# EAGLE board proiect1 (EAGLE 9.7.0)
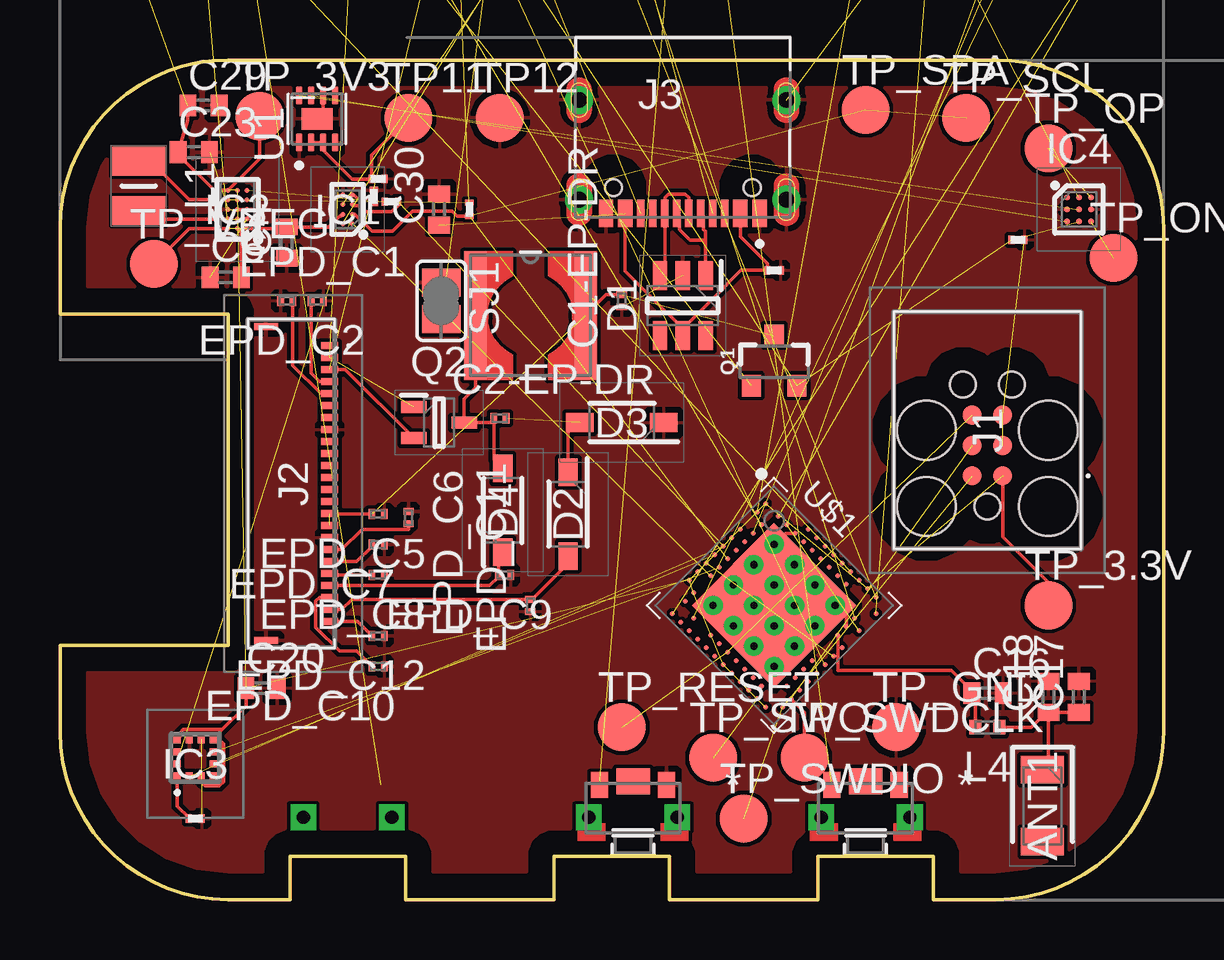
[diagram p0: board, top side]
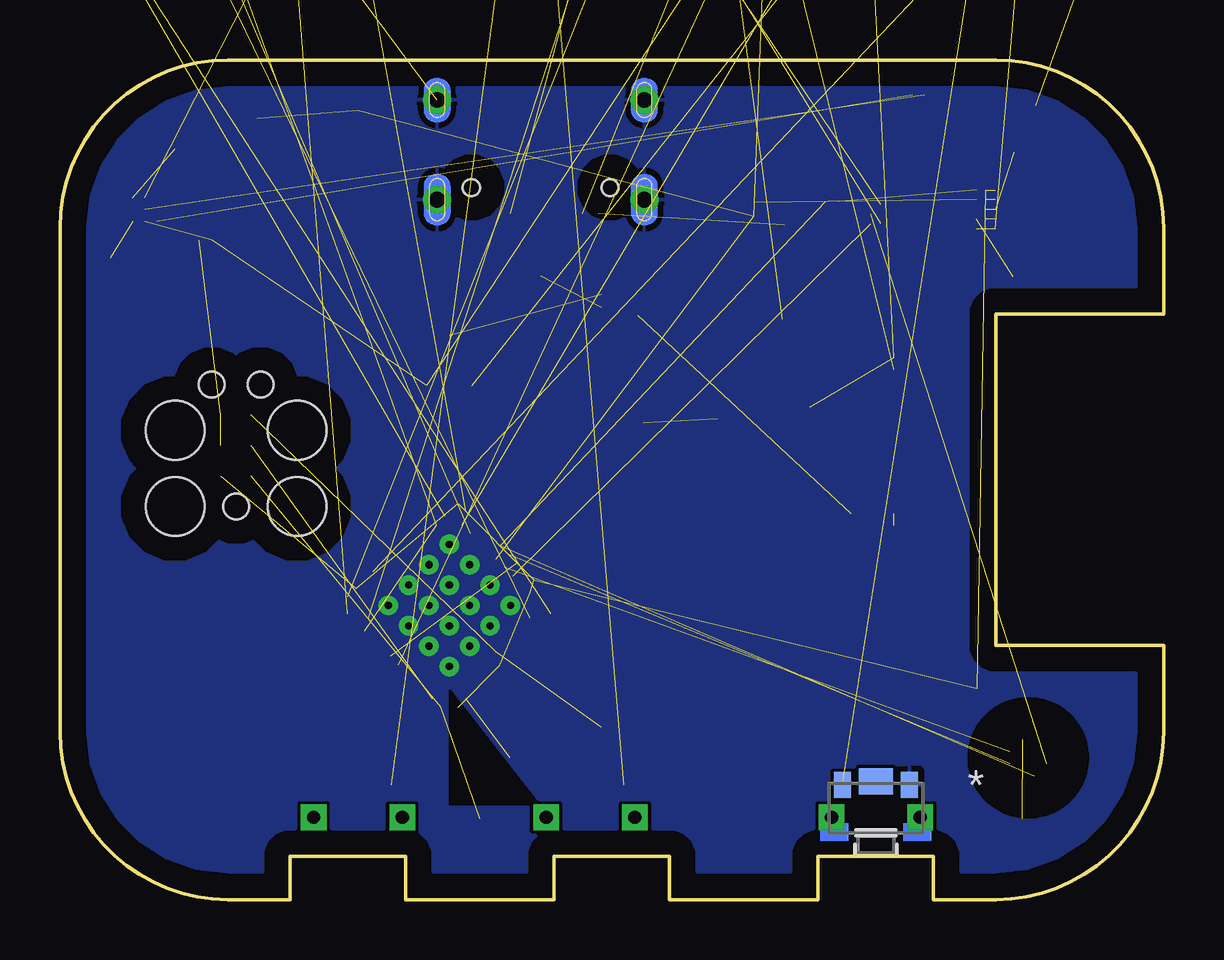
[diagram p1: board, bottom side, seen from below]

Size 46 x 35 mm. Coordinates in mm from the lower left corner, seen from the top.
Outline: 39,0 36.4,0 36.4,1.8 31.6,1.8 31.6,0 25.4,0 25.4,1.8 20.6,1.8 20.6,0 14.4,0 14.4,1.8 9.6,1.8 9.6,0 7,0 arc-90 0,7 0,10.6 7,10.6 7,24.4 0,24.4 0,28 arc-90 7,35 39,35 arc-90 46,28 46,7 arc-90 39,0
Copper layers (1*16): Top / Bottom
Stack-up Default Layer Stack: Top SilkScreen Epoxy Ink / Top SolderMask SR:Green 0.0254mm Dk 4.3 / Top Surface Finish Lead-Free 0.02mm / Top CuFoil:007 0.035mm / Dielectric-1 User Defined 1.5mm / Bottom CuFoil:007 0.035mm / Bottom Surface Finish Lead-Free 0.02mm / Bottom SolderMask SR:Green 0.0254mm Dk 4.3 / Bottom SilkScreen Epoxy Ink
Design rules: minimum copper width 6mil, minimum drill size 0.35mm, copper clearance wire_polygon to wire_polygon 6mil, copper clearance wire_polygon to pad_smd 6mil, copper clearance wire_polygon to via 6mil, copper clearance pad_smd to pad_smd 6mil, copper clearance pad_smd to via 6mil, copper clearance via to via 6mil, copper clearance smd to pad (same net) 6mil, copper clearance smd to via (same net) 6mil, copper clearance smd to smd (same net) 6mil, dimension clearance 40mil, via restrict clearance 0mil, restrict clearance 0mil, drill distance 6mil, keepout clearance 0mil

## Footprints (pad centres in the part's own frame; a part is rotated, then mirrored left to right if it is on the bottom)
2450AT18B100E_ANTC3216X140N = smd 1.15 x 1.8: 1 -1.5,0; 2 1.5,0
ESP32_C6_LIBRARY_1_ESP32_WROVER_EAGLE-LTSPICE_C0402 = smd 0.7 x 0.9: 1 -0.65,0; 2 0.65,0
NORDIC_NRF_3_RESC0201_L = smd 0.28 x 0.43: 1 -0.255,0; 2 0.255,0
GRM011R60J152KE01L_1_0201 = smd 0.35 x 0.25: 1 0,0.275; 2 0,-0.275
ESP32_C6_LIBRARY_3_SOT95P280X145-6N = smd 1.2 x 0.6: 1 -1.25,0.95; 2 -1.25,0; 3 -1.25,-0.95; 4 1.25,-0.95; 5 1.25,0; 6 1.25,0.95
ESP32_C6_LIBRARY_5_SOD3716X135N = smd 1.15 x 0.8: 1 -1.75,0; 2 1.75,0
BQ25180YBGR_BGA8C40P2X4_100X155X50 = smd 0.2 x 0.2: A1 -0.2,0.6; A2 0.2,0.6; B1 -0.2,0.2; B2 0.2,0.2; C1 -0.2,-0.2; C2 0.2,-0.2; D1 -0.2,-0.6; D2 0.2,-0.6
RT6160AWSC_BGA15C40P3X5_140X230X60 = smd 0.216 x 0.216: A1 -0.4,0.8; A2 0,0.8; A3 0.4,0.8; B1 -0.4,0.4; B2 0,0.4; B3 0.4,0.4; C1 -0.4,0; C2 0,0; C3 0.4,0; D1 -0.4,-0.4; D2 0,-0.4; D3 0.4,-0.4; E1 -0.4,-0.8; E2 0,-0.8; E3 0.4,-0.8
BMA423_BMA423 = smd 0.3 x 0.35: 1 -0.75,-0.775; 2 -0.25,-0.775; 3 0.25,-0.775; 4 0.75,-0.775; 7 0.75,0.775; 8 0.25,0.775; 9 -0.25,0.775; 10 -0.75,0.775 | smd 0.35 x 0.3: 5 0.775,-0.25; 6 0.775,0.25; 11 -0.775,0.25; 12 -0.775,-0.25
DRV2605YZFR_BGA9C50P3X3_144X144X62 = smd 0.25 x 0.25: A1 -0.5,0.5; A2 0,0.5; A3 0.5,0.5; B1 -0.5,0; B2 0,0; B3 0.5,0; C1 -0.5,-0.5; C2 0,-0.5; C3 0.5,-0.5
TC2030-IDC_TC2030IDC = smd 0.783 x 0.783: 1 -0.953,-0.635; 2 -0.953,0.635; 3 0.317,-0.635; 4 0.317,0.635; 5 1.588,-0.635; 6 1.588,0.635 | hole 2.451: -2.223,-2.54; -2.223,2.54; 0.952,-2.54; 0.952,2.54 | hole 1.067: -2.223,0; 2.857,-1.016; 2.857,1.016
503480-2400_5034802400 = smd 0.3 x 0.7: 1 -5.75,1.525; 2 -5.25,1.525; 3 -4.75,1.525; 4 -4.25,1.525; 5 -3.75,1.525; 6 -3.25,1.525; 7 -2.75,1.525; 8 -2.25,1.525; 9 -1.75,1.525; 10 -1.25,1.525; 11 -0.75,1.525; 12 -0.25,1.525; 13 0.25,1.525; 14 0.75,1.525; 15 1.25,1.525; 16 1.75,1.525; 17 2.25,1.525; 18 2.75,1.525; 19 3.25,1.525; 20 3.75,1.525; 21 4.25,1.525; 22 4.75,1.525; 23 5.25,1.525; 24 5.75,1.525 | smd 0.3 x 1: MP1 -6.54,-1.125; MP2 6.54,-1.125
KH-TYPE-C-16P_KINGHELM_KH-TYPE-C-16P = smd 0.6 x 1.15: A1_B12 -3.2,4.725; A4_B9 -2.4,4.725; A9_B4 2.4,4.725; A12_B1 3.2,4.725 | smd 0.3 x 1.15: A5 -1.25,4.725; A6 -0.25,4.725; A7 0.25,4.725; A8 1.25,4.725; B5 1.75,4.725; B6 0.75,4.725; B7 -0.75,4.725; B8 -1.75,4.725 | drill 0.65 pad 1.05: SH1 -4.32,0; SH2 4.32,0; SH3 -4.32,4.15; SH4 4.32,4.15 | hole 0.7: -2.89,3.65; 2.89,3.65
MLP2016SR47MT0S1_INDC2016X100N = smd 1.2 x 2.2: 1 -1.028,0; 2 1.028,0
NORDIC_NRF_2_RESC0402_L = smd 0.5 x 0.6: 1 -0.5,0; 2 0.5,0
ESP32_C6_LIBRARY_2_IND_4828-WE-TPC_WRE = smd 0.9 x 5.3: 1 -2.286,0; 2 2.286,0
ESP32_C6_LIBRARY_4_ESP32_C6_LIBRARY_4_ESP32_C6_LIBRARY_4_ESP32_C6_LIBRARY_4_ESP32_WROVER_SPARKFUN-DISCRETESEMI_SOT23-3 = smd 0.8 x 0.9: 1 -0.95,-1; 2 0.95,-1; 3 0,1.1
ESP32_C6_LIBRARY_6_SOT65P210X110-3N = smd 1.05 x 0.5: 1 -1.05,0.65; 2 -1.05,-0.65; 3 1.05,0
CPF0201D7K68C1_0201 = smd 0.35 x 0.25: 1 0,0.275; 2 0,-0.275
ESP32_C6_LIBRARY_7_JUMPER_SJ = smd 1.168 x 1.6: 1 -0.762,0; 2 0.762,0
2025-10-22_07-23-44_LIBRARY_SW_EVP-AKE31A_PAN = smd 0.711 x 1.092: 1 -1.4,-0.972; 2 1.4,-0.972 | drill 0.559 pad 0.914 square: 3 -1.848,0.381; 4 1.848,0.381 | smd 1.397 x 1.092: 5 0,-1.124
HECTOR_WATCH_1_TP20R = smd 2 x 2: TP 0,0
ESP32_C6_LIBRARY_SON50P200X200X80-9N = smd 0.76 x 0.27: 1 -0.985,0.75; 2 -0.985,0.25; 3 -0.985,-0.25; 4 -0.985,-0.75; 5 0.985,-0.75; 6 0.985,-0.25; 7 0.985,0.25; 8 0.985,0.75 | smd 0.9 x 1.3: 9 0,0
NORDIC_NRF_4_AQFN50P700X700X85_HS-74N = smd 4.85 x 4.85: P$74 0,0 | drill 0.3 pad 0.6: P$75 -1.8,1.8; P$76 -0.6,1.8; P$77 0.6,1.8; P$78 1.8,1.8; P$79 -1.8,0.6; P$80 -0.6,0.6; P$81 0.6,0.6; P$82 1.8,0.6; P$83 -1.8,-0.6; P$84 -0.6,-0.6; P$85 0.6,-0.6; P$86 1.8,-0.6; P$87 -1.8,-1.8; P$88 -0.6,-1.8; P$89 0.6,-1.8; P$90 1.8,-1.8 | smd 0.2 x 0.2: P$A8 -1.25,3.25; P$A10 -0.75,3.25; P$A12 -0.25,3.25; P$A14 0.25,3.25; P$A16 0.75,3.25; P$A18 1.25,3.25; P$A20 1.75,3.25; P$A22 2.25,3.25; P$A23 2.75,3.25; P$AA24 3.25,-2.25; P$AB2 -2.75,-2.5; P$AC5 -2,-2.75; P$AC9 -1,-2.75; P$AC11 -0.5,-2.75; P$AC13 0,-2.75; P$AC15 0.5,-2.75; P$AC17 1,-2.75; P$AC19 1.5,-2.75; P$AC21 2,-2.75; P$AC24 3.25,-2.75; P$AD2 -2.75,-3.25; P$AD4 -2.25,-3.25; P$AD6 -1.75,-3.25; P$AD8 -1.25,-3.25; P$AD10 -0.75,-3.25; P$AD12 -0.25,-3.25; P$AD14 0.25,-3.25; P$AD16 0.75,-3.25; P$AD18 1.25,-3.25; P$AD20 1.75,-3.25; P$AD22 2.25,-3.25; P$AD23 2.75,-3.25; P$B1 -3.25,2.75; P$B3 -2.5,2.75; P$B5 -2,2.75; P$B7 -1.5,2.75; P$B9 -1,2.75; P$B11 -0.5,2.75; P$B13 0,2.75; P$B15 0.5,2.75; P$B17 1,2.75; P$B19 1.5,2.75; P$B24 3.25,2.75; P$C1 -3.25,2.25; P$D2 -2.75,2; P$D23 2.75,2; P$E24 3.25,1.75; P$F2 -2.75,1.5; P$F23 2.75,1.5; P$G1 -3.25,1.25; P$H2 -2.75,1; P$H23 2.75,1; P$J1 -3.25,0.75; P$J24 3.25,0.75; P$K2 -2.75,0.5; P$L1 -3.25,0.25; P$L24 3.25,0.25; P$M2 -2.75,0; P$N1 -3.25,-0.25; P$N24 3.25,-0.25; P$P2 -2.75,-0.5; P$P23 2.75,-0.5; P$R1 -3.25,-0.75; P$R24 3.25,-0.75; P$T2 -2.75,-1; P$T23 2.75,-1; P$U1 -3.25,-1.25; P$U24 3.25,-1.25; P$V23 2.75,-1.5; P$W1 -3.25,-1.75; P$W24 3.25,-1.75; P$Y2 -2.75,-2; P$Y23 2.75,-2
NORDIC_NRF_1_XTAL_3215_N = smd 1 x 1.8: 1 -1.25,0; 2 1.25,0
NORDIC_NRF_BT-XTAL_2016_N = smd 0.95 x 0.85: 1 -0.725,-0.575; 2 0.725,-0.575; 3 0.725,0.575; 4 -0.725,0.575

## Placement (x,y rotation side)
ANT1  2450AT18B100E  [2450AT18B100E_ANTC3216X140N]  40.95,3.91 270 top
C1  10uF  [ESP32_C6_LIBRARY_1_ESP32_WROVER_EAGLE-LTSPICE_C0402]  5.64,51.63 0 top  (outside the outline)
C1-EP-DR  10uF  [NORDIC_NRF_3_RESC0201_L]  23.42,24.96 90 top
C2  1uF  [GRM011R60J152KE01L_1_0201]  33.7,61.79 0 top  (outside the outline)
C2-EP-DR  4.7uF/25V  [NORDIC_NRF_3_RESC0201_L]  18.34,20.06 0 top
C3  1uF  [GRM011R60J152KE01L_1_0201]  32.31,61.79 0 top  (outside the outline)
C4  10uF  [ESP32_C6_LIBRARY_1_ESP32_WROVER_EAGLE-LTSPICE_C0402]  9.45,27.39 90 top
C5  0.1uF  [ESP32_C6_LIBRARY_1_ESP32_WROVER_EAGLE-LTSPICE_C0402]  6.91,25.94 0 top
C6  22uF  [ESP32_C6_LIBRARY_1_ESP32_WROVER_EAGLE-LTSPICE_C0402]  36.12,56.71 0 top  (outside the outline)
C7  22uF  [ESP32_C6_LIBRARY_1_ESP32_WROVER_EAGLE-LTSPICE_C0402]  29.77,56.71 0 top  (outside the outline)
C8  4.7µF  [ESP32_C6_LIBRARY_1_ESP32_WROVER_EAGLE-LTSPICE_C0402]  -0.71,51.63 0 top  (outside the outline)
C9  100nF  [ESP32_C6_LIBRARY_1_ESP32_WROVER_EAGLE-LTSPICE_C0402]  36.12,51.63 0 top  (outside the outline)
C10  1.0µF  [ESP32_C6_LIBRARY_1_ESP32_WROVER_EAGLE-LTSPICE_C0402]  -7.06,51.63 0 top  (outside the outline)
C11  47nF  [ESP32_C6_LIBRARY_1_ESP32_WROVER_EAGLE-LTSPICE_C0402]  23.42,56.71 0 top  (outside the outline)
C12  100nF  [ESP32_C6_LIBRARY_1_ESP32_WROVER_EAGLE-LTSPICE_C0402]  28.5,51.63 0 top  (outside the outline)
C13  N.C.  [ESP32_C6_LIBRARY_1_ESP32_WROVER_EAGLE-LTSPICE_C0402]  -7.06,56.71 0 top  (outside the outline)
C14  100pF  [ESP32_C6_LIBRARY_1_ESP32_WROVER_EAGLE-LTSPICE_C0402]  20.88,51.63 0 top  (outside the outline)
C15  N.C.  [ESP32_C6_LIBRARY_1_ESP32_WROVER_EAGLE-LTSPICE_C0402]  -12.14,56.71 0 top  (outside the outline)
C16  1pF  [ESP32_C6_LIBRARY_1_ESP32_WROVER_EAGLE-LTSPICE_C0402]  38.66,8.6 0 top
C17  1pF  [ESP32_C6_LIBRARY_1_ESP32_WROVER_EAGLE-LTSPICE_C0402]  42.47,8.45 90 top
C18  N.C  [ESP32_C6_LIBRARY_1_ESP32_WROVER_EAGLE-LTSPICE_C0402]  41.2,8.45 90 top
C19  820pF  [ESP32_C6_LIBRARY_1_ESP32_WROVER_EAGLE-LTSPICE_C0402]  13.26,51.63 0 top  (outside the outline)
C20  100nF  [ESP32_C6_LIBRARY_1_ESP32_WROVER_EAGLE-LTSPICE_C0402]  8.4,8.81 0 top
C21  12pF  [ESP32_C6_LIBRARY_1_ESP32_WROVER_EAGLE-LTSPICE_C0402]  17.07,56.71 0 top  (outside the outline)
C22  12pF  [ESP32_C6_LIBRARY_1_ESP32_WROVER_EAGLE-LTSPICE_C0402]  10.72,56.71 0 top  (outside the outline)
C23  100nF  [ESP32_C6_LIBRARY_1_ESP32_WROVER_EAGLE-LTSPICE_C0402]  5.58,31.16 0 top
C24  4.7µF  [ESP32_C6_LIBRARY_1_ESP32_WROVER_EAGLE-LTSPICE_C0402]  55.17,56.71 0 top  (outside the outline)
C25  4.7µF  [ESP32_C6_LIBRARY_1_ESP32_WROVER_EAGLE-LTSPICE_C0402]  48.82,56.71 0 top  (outside the outline)
C26  4.7µF  [ESP32_C6_LIBRARY_1_ESP32_WROVER_EAGLE-LTSPICE_C0402]  42.47,56.71 0 top  (outside the outline)
C27  12pF  [ESP32_C6_LIBRARY_1_ESP32_WROVER_EAGLE-LTSPICE_C0402]  4.37,56.71 0 top  (outside the outline)
C28  12pF  [ESP32_C6_LIBRARY_1_ESP32_WROVER_EAGLE-LTSPICE_C0402]  -1.98,56.71 0 top  (outside the outline)
C29  100nF  [ESP32_C6_LIBRARY_1_ESP32_WROVER_EAGLE-LTSPICE_C0402]  5.98,33.1 0 top
C30  4.7uF  [ESP32_C6_LIBRARY_1_ESP32_WROVER_EAGLE-LTSPICE_C0402]  15.8,28.77 90 top
C31  0.1uF  [GRM011R60J152KE01L_1_0201]  29.77,26.23 90 top
C32  1uF  [GRM011R60J152KE01L_1_0201]  29.77,61.79 0 top  (outside the outline)
C33  1uF  [GRM011R60J152KE01L_1_0201]  27.23,61.79 0 top  (outside the outline)
C34  1uF  [GRM011R60J152KE01L_1_0201]  24.69,61.79 0 top  (outside the outline)
C35  1uF  [GRM011R60J152KE01L_1_0201]  36.12,41.47 180 top  (outside the outline)
C36  0.1uF  [GRM011R60J152KE01L_1_0201]  39.93,27.5 270 top
C37  0.1uF  [GRM011R60J152KE01L_1_0201]  13.26,30.04 270 top
D1  ESP32_C6_LIBRARY_3_USBLC6-2SC6Y  [ESP32_C6_LIBRARY_3_SOT95P280X145-6N]  25.96,24.76 270 top
D2  MBR0530  [ESP32_C6_LIBRARY_5_SOD3716X135N]  21.18,16.07 270 top
D3  MBR0530  [ESP32_C6_LIBRARY_5_SOD3716X135N]  23.42,19.88 180 top
D4  MBR0530  [ESP32_C6_LIBRARY_5_SOD3716X135N]  18.46,16.22 90 top
EPD_C1  1uF/50V  [NORDIC_NRF_3_RESC0201_L]  9.45,24.96 0 top
EPD_C2  1uF/50V  [NORDIC_NRF_3_RESC0201_L]  10.72,24.96 180 top
EPD_C5  1uF/50V  [NORDIC_NRF_3_RESC0201_L]  13.26,16.07 180 top
EPD_C6  1uF/50V  [NORDIC_NRF_3_RESC0201_L]  14.53,15.92 270 top
EPD_C7  1uF/50V  [NORDIC_NRF_3_RESC0201_L]  13.26,14.8 180 top
EPD_C8  1uF/50V  [NORDIC_NRF_3_RESC0201_L]  13.26,13.53 180 top
EPD_C9  1uF/50V  [NORDIC_NRF_3_RESC0201_L]  18.54,13.53 180 top
EPD_C10  1uF/50V  [NORDIC_NRF_3_RESC0201_L]  13.26,9.72 180 top
EPD_C11  1uF/50V  [NORDIC_NRF_3_RESC0201_L]  19.61,12.26 90 top
EPD_C12  1uF/50V  [NORDIC_NRF_3_RESC0201_L]  13.26,10.99 180 top
IC1  BQ25180YBGR_BQ25180YBGR  [BQ25180YBGR_BGA8C40P2X4_100X155X50]  11.99,28.77 180 top
IC2  RT6160AWSC_RT6160AWSC  [RT6160AWSC_BGA15C40P3X5_140X230X60]  7.4,28.77 180 top
IC3  BMA423  [BMA423_BMA423]  5.64,5.91 0 top
IC4  DRV2605YZFR  [DRV2605YZFR_BGA9C50P3X3_144X144X62]  42.47,28.77 0 top
J1  TC2030-IDC  [TC2030-IDC_TC2030IDC]  38.66,18.61 90 top
J2  503480-2400_503480-2400  [503480-2400_5034802400]  9.72,17.34 270 top
J3  KH-TYPE-C-16P_KH-TYPE-C-16P  [KH-TYPE-C-16P_KINGHELM_KH-TYPE-C-16P]  25.96,33.33 180 top
L1  MLP2016SR47MT0S1_FTC252012SR47MBCA  [MLP2016SR47MT0S1_INDC2016X100N]  3.28,29.75 90 top
L2  10uH  [NORDIC_NRF_2_RESC0402_L]  50.09,51.63 0 top  (outside the outline)
L3  15nH  [NORDIC_NRF_2_RESC0402_L]  43.74,51.63 0 top  (outside the outline)
L4  3.9nH  [NORDIC_NRF_2_RESC0402_L]  38.66,7.18 180 top
L6  68uH  [ESP32_C6_LIBRARY_2_IND_4828-WE-TPC_WRE]  19.61,24.35 0 top
Q1  20V/4.2A/52mΩ/1.4W  [ESP32_C6_LIBRARY_4_ESP32_C6_LIBRARY_4_ESP32_C6_LIBRARY_4_ESP32_C6_LIBRARY_4_ESP32_WROVER_SPARKFUN-DISCRETESEMI_SOT23-3]  29.77,22.42 0 top
Q2  SI1308EDL-T1-GE3  [ESP32_C6_LIBRARY_6_SOT65P210X110-3N]  15.8,19.88 0 top
R1  10k  [CPF0201D7K68C1_0201]  13.08,29.31 0 top
R1_EP_DR  0.47  [CPF0201D7K68C1_0201]  20.88,61.79 0 top  (outside the outline)
R1_USB  5K1  [CPF0201D7K68C1_0201]  18.34,61.79 0 top  (outside the outline)
R2  3k3  [CPF0201D7K68C1_0201]  15.8,61.79 0 top  (outside the outline)
R2_EP_DR  10K  [CPF0201D7K68C1_0201]  13.26,61.79 0 top  (outside the outline)
R2_USB  5K1  [CPF0201D7K68C1_0201]  10.72,61.79 0 top  (outside the outline)
R3  3k3  [CPF0201D7K68C1_0201]  8.18,61.79 0 top  (outside the outline)
R4  0  [CPF0201D7K68C1_0201]  5.64,3.37 90 top
R5  0  [CPF0201D7K68C1_0201]  17.07,28.77 180 top
R6  0  [CPF0201D7K68C1_0201]  13.81,29.09 270 top
R7  10K  [CPF0201D7K68C1_0201]  4.37,61.79 0 top  (outside the outline)
R8  10K  [CPF0201D7K68C1_0201]  1.83,61.79 0 top  (outside the outline)
R9  10K  [CPF0201D7K68C1_0201]  -0.71,61.79 0 top  (outside the outline)
R_PWR_EPD  10K  [CPF0201D7K68C1_0201]  -3.25,61.79 0 top  (outside the outline)
R_TYPE_SEL  2.2  [CPF0201D7K68C1_0201]  -5.79,61.79 0 top  (outside the outline)
SJ1  [ESP32_C6_LIBRARY_7_JUMPER_SJ]  15.89,24.96 270 top
SW_DN  2025-10-22_07-23-44_LIBRARY_EVP-AKE31ASW_EVP-AKE31A_PAN  [2025-10-22_07-23-44_LIBRARY_SW_EVP-AKE31A_PAN]  33.58,3.81 180 top
SW_ENT  2025-10-22_07-23-44_LIBRARY_EVP-AKE31ASW_EVP-AKE31A_PAN  [2025-10-22_07-23-44_LIBRARY_SW_EVP-AKE31A_PAN]  23.89,3.81 180 top
SW_UP  2025-10-22_07-23-44_LIBRARY_EVP-AKE31ASW_EVP-AKE31A_PAN  [2025-10-22_07-23-44_LIBRARY_SW_EVP-AKE31A_PAN]  11.99,3.81 180 bottom
TP11  HECTOR_WATCH_1_TPTP20R  [HECTOR_WATCH_1_TP20R]  14.53,32.58 0 top
TP12  HECTOR_WATCH_1_TPTP20R  [HECTOR_WATCH_1_TP20R]  18.34,32.58 0 top
TP_3.3V  HECTOR_WATCH_1_TPTP20R  [HECTOR_WATCH_1_TP20R]  41.2,12.26 0 top
TP_3V3  HECTOR_WATCH_1_TPTP20R  [HECTOR_WATCH_1_TP20R]  8.32,32.66 0 top
TP_GND  HECTOR_WATCH_1_TPTP20R  [HECTOR_WATCH_1_TP20R]  34.85,7.18 0 top
TP_ON  HECTOR_WATCH_1_TPTP20R  [HECTOR_WATCH_1_TP20R]  43.91,26.75 0 top
TP_OP  HECTOR_WATCH_1_TPTP20R  [HECTOR_WATCH_1_TP20R]  41.2,31.31 0 top
TP_RESET  HECTOR_WATCH_1_TPTP20R  [HECTOR_WATCH_1_TP20R]  23.42,7.18 0 top
TP_SCL  HECTOR_WATCH_1_TPTP20R  [HECTOR_WATCH_1_TP20R]  37.78,32.58 0 top
TP_SDA  HECTOR_WATCH_1_TPTP20R  [HECTOR_WATCH_1_TP20R]  33.58,32.91 0 top
TP_SWDCLK  HECTOR_WATCH_1_TPTP20R  [HECTOR_WATCH_1_TP20R]  31.04,5.91 0 top
TP_SWDIO  HECTOR_WATCH_1_TPTP20R  [HECTOR_WATCH_1_TP20R]  28.5,3.37 0 top
TP_SWO  HECTOR_WATCH_1_TPTP20R  [HECTOR_WATCH_1_TP20R]  27.23,5.91 0 top
TP_VREG  HECTOR_WATCH_1_TPTP20R  [HECTOR_WATCH_1_TP20R]  3.91,26.49 0 top
U1  MAX17048G+T10  [ESP32_C6_LIBRARY_SON50P200X200X80-9N]  10.72,32.54 90 top
U$1  NORDIC_NRF_4_NRF52840_QF  [NORDIC_NRF_4_AQFN50P700X700X85_HS-74N]  29.77,12.26 315 top
U$3  32.768kHz  [NORDIC_NRF_1_XTAL_3215_N]  47.55,61.79 0 top  (outside the outline)
X1  32MHz  [NORDIC_NRF_BT-XTAL_2016_N]  38.66,61.79 0 top  (outside the outline)

## Library data of the parts
ANT1 = InkTime_v5; ARROW_PART_NUMBER: 2450AT18B100E; ARROW_PRICE-STOCK: https://www.arrow.com/en/products/2450at18b100e/johanson-dielectrics?utm_currency=USD&region=nac; DESCRIPTION: Antennas 2.45GHz ANTENNA; HEIGHT: 1.4mm; MANUFACTURER_NAME: JOHANSON TECHNOLOGY; MANUFACTURER_PART_NUMBER: 2450AT18B100E; MOUSER_PART_NUMBER: 609-2450AT18B100E; MOUSER_PRICE-STOCK: https://www.mouser.co.uk/ProductDetail/Johanson-Technology/2450AT18B100E?qs=yCnrNFeXz%252Bh5MFsFIXGZGA%3D%3D
C1 C4-C30 = InkTime_v5; SPICEMODEL: NONE; SPICEPREFIX: C
C1-EP-DR C2 C2-EP-DR C3 C31-C37 EPD_C1 EPD_C2 EPD_C5-EPD_C12 L2-L4 R1 R1_EP_DR R1_USB R2 R2_EP_DR R2_USB R3-R9 R_PWR_EPD R_TYPE_SEL SJ1 TP11 TP12 TP_3.3V TP_3V3 TP_GND TP_ON TP_OP TP_RESET TP_SCL TP_SDA TP_SWDCLK TP_SWDIO TP_SWO TP_VREG U$1 U$3 X1 = InkTime_v5
D1 = InkTime_v5; AVAILABILITY: In Stock; CHECK_PRICES: https://www.snapeda.com/parts/USBLC6-2SC6Y/STMicroelectronics/view-part/?ref=eda; DESCRIPTION: 17V Clamp 5A (8/20µs) Ipp Tvs Diode Surface Mount SOT-23-6; MF: STMicroelectronics; MP: USBLC6-2SC6Y; PACKAGE: SOT-23-6 STMicroelectronics; PRICE: None; SNAPEDA_LINK: https://www.snapeda.com/parts/USBLC6-2SC6Y/STMicroelectronics/view-part/?ref=snap
D2-D4 = InkTime_v5; AVAILABILITY: In Stock; CHECK_PRICES: https://www.snapeda.com/parts/MBR0530/Onsemi/view-part/?ref=eda; DESCRIPTION: Diode Schottky 30 V 500mA Surface Mount SOD-123; MF: ON Semiconductor; MP: MBR0530; PACKAGE: SOD-123-2 ON Semiconductor; PRICE: None; PURCHASE-URL: https://www.snapeda.com/api/url_track_click_mouser/?unipart_id=179458&manufacturer=ON Semiconductor&part_name=MBR0530&search_term=None; SNAPEDA_LINK: https://www.snapeda.com/parts/MBR0530/Onsemi/view-part/?ref=snap
IC1 = InkTime_v5; ARROW_PART_NUMBER: BQ25180YBGR; ARROW_PRICE-STOCK: https://www.arrow.com/en/products/bq25180ybgr/texas-instruments?utm_currency=USD&region=nac; DESCRIPTION: Charger IC Lithium Ion/Polymer, Lithium Iron Phosphate 8-DSBGA (1.6x1.1); HEIGHT: 0.5mm; MANUFACTURER_NAME: Texas Instruments; MANUFACTURER_PART_NUMBER: BQ25180YBGR; MOUSER_PART_NUMBER: 595-BQ25180YBGR; MOUSER_PRICE-STOCK: https://www.mouser.co.uk/ProductDetail/Texas-Instruments/BQ25180YBGR?qs=doiCPypUmgEWjAK%252BJAX6Tw%3D%3D
IC2 = InkTime_v5; DESCRIPTION: Buck-Boost Regulator Positive Output Step-Up/Step-Down I2C DC-DC Controller IC 15-WL-CSP (BSC) (1.4x2.3); HEIGHT: 0.6mm; MANUFACTURER_NAME: RICHTEK; MANUFACTURER_PART_NUMBER: RT6160AWSC; MOUSER_PART_NUMBER: 835-RT6160AWSC; MOUSER_PRICE-STOCK: https://www.mouser.co.uk/ProductDetail/Richtek/RT6160AWSC?qs=amGC7iS6iy%2FLd9PSoixZXQ%3D%3D
IC3 = InkTime_v5; ARROW_PART_NUMBER: BMA423; ARROW_PRICE-STOCK: https://www.arrow.com/en/products/bma423/bosch; DESCRIPTION: Accelerometers Triaxial low-g 12bit Acceleration Sensor; HEIGHT: 1mm; MANUFACTURER_NAME: BOSCH; MANUFACTURER_PART_NUMBER: BMA423; MOUSER_PART_NUMBER: 262-BMA423; MOUSER_PRICE-STOCK: https://www.mouser.co.uk/ProductDetail/Bosch-Sensortec/BMA423?qs=HXFqYaX1Q2xC%252BSgeGoX3mg%3D%3D
IC4 = InkTime_v5; ARROW_PART_NUMBER: DRV2605YZFR; ARROW_PRICE-STOCK: https://www.arrow.com/en/products/drv2605yzfr/texas-instruments?region=nac; DESCRIPTION: Haptic Driver for ERM/LRA with Built-In Library and Smart Loop Architecture; HEIGHT: 0.625mm; MANUFACTURER_NAME: Texas Instruments; MANUFACTURER_PART_NUMBER: DRV2605YZFR
J1 = InkTime_v5; DESCRIPTION: CABLE ADAPTER 6 POS; HEIGHT: 19mm; MANUFACTURER_NAME: Tag Connect; MANUFACTURER_PART_NUMBER: TC2030-IDC
J2 = InkTime_v5; DESCRIPTION: FFC & FPC Connectors 0.5mm FPC RA SMT Dual Contact 24Ckt; HEIGHT: 1.87mm; MANUFACTURER_NAME: Molex; MANUFACTURER_PART_NUMBER: 503480-2400; MOUSER_PART_NUMBER: 538-503480-2400; MOUSER_PRICE-STOCK: https://www.mouser.co.uk/ProductDetail/Molex/503480-2400?qs=OAhjpuo3Vu7efIoxFh9AOw%3D%3D
J3 = InkTime_v5; AVAILABILITY: Not in stock; CHECK_PRICES: https://www.snapeda.com/parts/KH-TYPE-C-16P/Kinghelm/view-part/?ref=eda; MF: kinghelm; MP: KH-TYPE-C-16P; PACKAGE: None; PRICE: None; SNAPEDA_LINK: https://www.snapeda.com/parts/KH-TYPE-C-16P/Kinghelm/view-part/?ref=snap
L1 = InkTime_v5; DESCRIPTION: SMD / SMT Inductors (Coils), L=0.47?H, L x W x T :; HEIGHT: 1mm; JLCPCB: https://jlcpcb.com/partdetail/6763488-FTC252012SR47MBCA/C5832368; MANUFACTURER_NAME: TDK; MANUFACTURER_PART_NUMBER: FTC252012SR47MBCA
L6 = InkTime_v5; COPYRIGHT: Copyright (C) 2024 Ultra Librarian. All rights reserved.; MANUFACTURER_PART_NUMBER: 744043680; MFR_NAME: Wurth Electronics
Q1 = InkTime_v5; PROD_ID: TRAN-14388
Q2 = InkTime_v5; AVAILABILITY: In Stock; CHECK_PRICES: https://www.snapeda.com/parts/SI1308EDL-T1-GE3/Vishay+Siliconix/view-part/?ref=eda; DESCRIPTION: Si1308EDL-T1-GE3 N-channel MOSFET Transistor, 1.5 A, 30 V, 3-Pin SC-70 | Siliconix / Vishay SI1308EDL-T1-GE3; MF: Vishay Siliconix; MP: SI1308EDL-T1-GE3; PACKAGE: SOT-323 Vishay Semiconductor; PRICE: None; PURCHASE-URL: https://www.snapeda.com/api/url_track_click_mouser/?unipart_id=274603&manufacturer=Vishay Siliconix&part_name=SI1308EDL-T1-GE3&search_term=None; SNAPEDA_LINK: https://www.snapeda.com/parts/SI1308EDL-T1-GE3/Vishay+Siliconix/view-part/?ref=snap
SW_DN SW_ENT SW_UP = InkTime_v5; COPYRIGHT: Copyright (C) 2025 Ultra Librarian. All rights reserved.; DIGI-KEY_PART_NUMBER_1: P123437TR-ND; DIGI-KEY_PART_NUMBER_2: P123437CT-ND; DIGI-KEY_PART_NUMBER_3: P123437DKR-ND; MANUFACTURER_NAME: Panasonic; MANUFACTURER_PART_NUMBER: EVP-AKE31A
U1 = InkTime_v5; AVAILABILITY: In Stock; CHECK_PRICES: https://www.snapeda.com/parts/MAX17048G+T10/Analog+Devices/view-part/?ref=eda; DESCRIPTION: 3µA 1-Cell/2-Cell Fuel Gauge with ModelGauge; MF: Analog Devices; MP: MAX17048G+T10; PACKAGE: TDFN-8 Maxim; PRICE: None; PURCHASE-URL: https://www.snapeda.com/api/url_track_click_mouser/?unipart_id=329239&manufacturer=Analog Devices&part_name=MAX17048G+T10&search_term=None; SNAPEDA_LINK: https://www.snapeda.com/parts/MAX17048G+T10/Analog+Devices/view-part/?ref=snap

## Nets
3V3/1.7D: C36.2 IC4.C2 Q1.2 R7.2 R8.2 R9.2 R_PWR_EPD.2
3V3/2.4A: C6.1 C7.1 C8.1 C12.1 C20.1 C23.1 C26.1 C29.1 IC2.E2 IC2.E3 IC3.3 IC3.7 IC3.10 J1.1 R2.1 R3.1 TP_3.3V.TP TP_3V3.TP U$1.P$A22 U$1.P$AD14 U$1.P$AD23 U$1.P$B1 U$1.P$W1 U$1.P$Y2
ALERT/1.6C: U1.5
ALERT/2.5C: U$1.P$J24
D+/1.5D: D1.4
D+/2.7D: U$1.P$AD6
D-/1.5D: D1.6
D-/2.7D: U$1.P$AD4
DN: D1.1 J3.A7 J3.B7
DP: D1.3 J3.A6 J3.B6
EPD_3V3: C1-EP-DR.2 EPD_C5.2 J2.15 J2.16 L6.2 Q1.3
EPD_BUSY/1.5D: J2.9
EPD_BUSY/2.2: U$1.P$AD12
EPD_CS/1.4C: J2.12
EPD_CS/2.2D: U$1.P$K2
EPD_DC/1.5D: J2.11
EPD_DC/2.2D: U$1.P$AD10
EPD_RST/1.5D: J2.10
EPD_RST/2.2D: U$1.P$AC11
GDR: J2.2 Q2.1 R2_EP_DR.2
GND: C1-EP-DR.1 C1.2 C2.1 C3.1 C4.1 C5.1 C6.2 C7.2 C8.2 C9.2 C10.2 C11.2 C12.2 C13.2 C14.2 C15.2 C16.2 C17.2 C18.2 C19.2 C20.2 C21.2 C22.2 C23.2 C24.2 C25.2 C26.2 C27.1 C28.1 C29.2 C30.2 C31.2 C32.1 C33.1 C34.1 C35.1 C36.1 C37.1 D1.2 D3.1 EPD_C1.1 EPD_C2.1 EPD_C5.1 EPD_C6.1 EPD_C7.1 EPD_C8.1 EPD_C9.1 EPD_C10.1 EPD_C11.1 EPD_C12.1 IC1.D2 IC2.B1 IC2.C1 IC2.C2 IC2.C3 IC3.8 IC3.9 IC4.B1 IC4.B3 J1.3 J1.5 J2.8 J2.17 J2.MP1 J2.MP2 J3.A1_B12 J3.A12_B1 J3.SH1 J3.SH2 J3.SH3 J3.SH4 R1.1 R1_USB.1 R2_EP_DR.1 R2_USB.2 R4.2 R_TYPE_SEL.1 SJ1.1 SW_DN.1 SW_ENT.1 SW_UP.1 TP12.TP TP_GND.TP U1.1 U1.4 U1.6 U1.9 U$1.P$74 U$1.P$75 U$1.P$76 U$1.P$77 U$1.P$78 U$1.P$79 U$1.P$80 U$1.P$81 U$1.P$82 U$1.P$83 U$1.P$84 U$1.P$85 U$1.P$86 U$1.P$87 U$1.P$88 U$1.P$89 U$1.P$90 U$1.P$B7 U$1.P$F23 X1.2 X1.4
HAPTIC_EN/1.4C: IC4.A1
HAPTIC_EN/2.6A: U$1.P$U1
IMU_INT1: IC3.5 U$1.P$N1
IMU_INT2: IC3.6 U$1.P$P2
LX1: IC2.B2 IC2.B3 L1.1
LX2: IC2.D2 IC2.D3 L1.2
MOSI/1.5B: J2.14
MOSI/2.2D: U$1.P$B13
N$1: IC2.D1 R5.2
N$2: IC2.E1 R6.2
N$3: L2.1 L3.2
N$4: J3.A5 R1_USB.2
N$5: IC1.D1 R1.2
N$6: J3.B5 R2_USB.1
N$10: C9.1 U$1.P$C1
N$11: L2.2 U$1.P$B3
N$13: C10.1 C11.1 C15.1 L3.1 U$1.P$B5 U$1.P$E24
N$15: C13.1 U$1.P$A18
N$16: C14.1 U$1.P$D23
N$17: C16.1 L4.2 U$1.P$H23
N$18: C19.1 U$1.P$N24
N$19: ANT1.1 C17.1 C18.1 L4.1
N$21: C22.1 U$1.P$B24 X1.1
N$22: C21.1 U$1.P$A23 X1.3
N$23: C24.1 U$1.P$AD2
N$25: C25.1 U$1.P$AC5
N$27: C27.2 U$1.P$D2 U$3.1
N$28: C28.2 U$1.P$F2 U$3.2
N$33: IC3.1 R4.1
N$34: EPD_C2.2 J2.4
N$35: EPD_C1.2 J2.5
N$37: EPD_C6.2 J2.18
N$38: EPD_C7.2 J2.19
N$39: EPD_C8.2 J2.20
N$41: EPD_C10.2 J2.22
N$43: EPD_C12.2 J2.24
N$51: C35.2 IC4.A2
N$60: C2-EP-DR.1 D4.2 L6.1 Q2.3
N$61: C2-EP-DR.2 D2.1 D3.2
N$64: R1_EP_DR.1 R_TYPE_SEL.2 SJ1.2
OUT+: IC4.A3 TP_OP.TP
OUT-: IC4.C3 TP_ON.TP
P0.04: U$1.P$J1
P0.13/1.5D: C32.2 R7.1 SW_UP.2
P0.13/2.6C: U$1.P$AD8
P0.14/1.5D: C33.2 R8.1 SW_ENT.2
P0.14/2.7C: U$1.P$AC9
P0.19: U$1.P$AC15
P0.20: U$1.P$AD16
P0.21: U$1.P$AC17
P0.22: U$1.P$AD18
P0.23: U$1.P$AC19
P0.24: U$1.P$AD20
P0.25: U$1.P$AC21
P0.26: U$1.P$G1
P0.27: U$1.P$H2
P0.28: U$1.P$B11
P0.29: U$1.P$A10
P0.30: U$1.P$B9
P0.31: U$1.P$A8
P1.01/1.6C: Q1.1 R_PWR_EPD.1
P1.01/2.4B: U$1.P$Y23
P1.02/1.6C: C34.2 R9.1 SW_DN.2
P1.02/2.8C: U$1.P$W24
P1.03: U$1.P$V23
P1.04: U$1.P$U24
P1.05: U$1.P$T23
P1.06: U$1.P$R24
P1.09: U$1.P$L24 U$1.P$R1
P1.10: U$1.P$A20
P1.11: U$1.P$B19
P1.12: U$1.P$B17
P1.13: U$1.P$A16
P1.14: U$1.P$B15
P1.15: U$1.P$A14
P1.037: U$1.P$P23
PMIC_INT: IC1.A1 U$1.P$T2
PREVGH: D4.1 EPD_C9.2 J2.21
PREVGL: D2.2 EPD_C11.2 J2.23
RESE: J2.3 Q2.2 R1_EP_DR.2
RESET: J1.6 TP_RESET.TP U$1.P$AC13
SCK/1.5B: J2.13
SCK/2.2D: U$1.P$A12
SCL/1.4C: IC4.C1 U1.7
SCL/2.4C: IC1.B1 IC3.12 R2.2 R3.2 R5.1 TP_SCL.TP TP_SDA.TP U$1.P$M2
SDA/1.4C: IC4.B2 U1.8
SDA/2.4C: IC1.C1 IC3.2 R6.1 U$1.P$L1
SWDCLK: J1.4 TP_SWDCLK.TP U$1.P$AA24
SWDIO: J1.2 TP_SWDIO.TP U$1.P$AC24
SWO: TP_SWO.TP U$1.P$AD22
VBAT/1.2A: C37.2 TP11.TP U1.2 U1.3
VBAT/2.5C: C2.2 IC1.C2
VBUS/1.5D: C30.1 C31.1 D1.5 J3.A4_B9 J3.A9_B4
VBUS/2.6D: C3.2 IC1.A2
VREG: C1.1 C4.2 C5.2 IC1.B2 IC2.A1 IC2.A2 IC2.A3 TP_VREG.TP

## Tracks (layer width: path | path; a pad name or v marks a point on that pad's centre or on a via)
3V3/1.7D  (6 unrouted)
3V3/2.4A  (16 unrouted)
  Top 0.152: TP_3V3.TP 8.32,30.89 IC2.E3 6.42,29.57 4.93,31.06 C23.1 5.33,32.48 C29.1 | 6.77,7.09 7.75,8.07 C20.1 7.75,8.71 | 6.77,7.09 6.39,6.71 IC3.7 6.62,6.68 6.82,6.48 6.82,4.91 6.63,4.73 6.04,4.73 5.89,4.88 IC3.3 | IC3.10 5.01,6.81 5.01,6.95 5.15,7.09 6.77,7.09 | J1.1 39.3,15.12 41.2,13.21 TP_3.3V.TP
DN
  Top 0.152: 26.71,26.21 D1.1 26.91,27.5 | 26.91,27.5 26.91,27.86 26.83,27.93 26.83,28.48 J3.B7 | J3.A7 25.83,28.48 25.83,27.93 26.27,27.5 26.91,27.5
DP
  Top 0.152: D1.3 25.21,26.21 J3.B6 25.21,29.25 25.36,29.41 26.06,29.41 26.21,29.25 J3.A6
EPD_3V3  (3 unrouted)
  Top 0.152: EPD_C5.2 11.26,16.07 J2.15 | C1-EP-DR.2 | C1-EP-DR.2 | C1-EP-DR.2 22.76,25.21 L6.2 | L6.2 | L6.2 | L6.2 | L6.2 | L6.2 | L6.2 | C1-EP-DR.2 | C1-EP-DR.2 | C1-EP-DR.2 | C1-EP-DR.2 | C1-EP-DR.2 | C1-EP-DR.2
GDR  (2 unrouted)
GND  (38 unrouted)
  Top 0.152: U$1.P$B7 30.23,15.27 U$1.P$75 U$1.P$74 U$1.P$78 32.77,11.8 U$1.P$F23 | IC2.C2 IC2.C1 | U1.9 10.97,32.79 U1.6
  pour Top: 47.1,2.4 47.1,33.6 43.1,37.6 -1,37.6 -1,-0.7 1.2,-2.9 41.8,-2.9
  pour Bottom: -2.6,-3.3 44.8,-3.3 47.2,-0.9 47.2,33.6 47.1,33.6 43.1,37.6 -1,37.6 -2.8,35.8 -2.8,-3.37 -2.71,-3.41
IMU_INT1  (1 unrouted)
IMU_INT2  (1 unrouted)
LX1  (1 unrouted)
  Top 0.152: IC2.B3 3.63,28.37 L1.1
LX2  (1 unrouted)
  Top 0.152: L1.2 3.78,30.78 5.39,29.17 IC2.D3
N$1  (1 unrouted)
N$2  (1 unrouted)
N$3  (1 unrouted)
N$4  (1 unrouted)
N$5
  Top 0.152: IC1.D1 12.26,29.37 12.39,29.23 12.89,29.23 R1.2
N$6  (1 unrouted)
N$10  (1 unrouted)
N$11  (1 unrouted)
N$13  (5 unrouted)
N$15  (1 unrouted)
N$16  (1 unrouted)
N$17
  Top 0.152: L4.2 38.16,8.45 C16.1 38.01,8.7 37.16,9.55 32.42,9.55 U$1.P$H23
N$18  (1 unrouted)
N$19
  Top 0.152: C18.1 41.1,7.8 40.48,7.18 L4.1 | C18.1 41.2,5.66 ANT1.1 | C17.1 C18.1
N$21  (2 unrouted)
N$22  (2 unrouted)
N$23  (1 unrouted)
N$25  (1 unrouted)
N$27  (2 unrouted)
N$28  (2 unrouted)
N$33
  Top 0.152: IC3.1 4.89,3.89 5.37,3.42 R4.1
N$34
  Top 0.152: EPD_C2.2 10.47,21.94 10.82,21.59 J2.4
N$35
  Top 0.152: EPD_C1.2 9.7,22.27 10.88,21.09 J2.5
N$37
  Top 0.152: EPD_C6.2 14.53,15.43 12.59,15.43 11.74,14.59 J2.18
N$38
  Top 0.152: EPD_C7.2 13.01,14.72 12.37,14.09 J2.19
N$39
  Top 0.152: EPD_C8.2 11.3,13.53 J2.20
N$41
  Top 0.152: J2.22 10.82,12.59 10.66,12.44 10.66,11.34 11.65,10.35 12.37,10.35 EPD_C10.2
N$43
  Top 0.152: EPD_C12.2 12.41,11.59 J2.24
N$51  (1 unrouted)
N$60
  Top 0.152: 18.09,19.88 Q2.3 16.85,20.88 17.32,21.35 L6.1 | C2-EP-DR.1 18.09,19.88 | 18.09,19.88 18.09,18.35 D4.2
N$61  (1 unrouted)
  Top 0.152: D3.2 21.18,19.88 D2.1
N$64  (2 unrouted)
OUT+  (1 unrouted)
OUT-  (1 unrouted)
P0.13/1.5D  (2 unrouted)
P0.14/1.5D  (2 unrouted)
P1.01/1.6C  (1 unrouted)
P1.02/1.6C  (2 unrouted)
P1.09  (1 unrouted)
PMIC_INT  (1 unrouted)
PREVGH
  Top 0.152: J2.21 12.77,13.09 17.91,13.09 18.28,13.45 EPD_C9.2 18.28,14.17 18.46,14.35 D4.1
PREVGL
  Top 0.152: D2.2 21.18,14.01 19.69,12.52 EPD_C11.2 12.17,12.52 11.74,12.09 J2.23
RESE  (1 unrouted)
  Top 0.152: J2.3 11.89,22.09 Q2.2
RESET  (2 unrouted)
SCL/1.4C  (1 unrouted)
SCL/2.4C  (6 unrouted)
  Top 0.152: IC1.B1 12.29,28.57 13,27.86 13.86,27.86 14.69,28.7 16.35,28.7 16.55,28.49 R5.1
SDA/1.4C  (1 unrouted)
SDA/2.4C  (2 unrouted)
  Top 0.152: IC1.C1 12.23,28.93 12.43,28.93 12.68,28.68 13.83,28.68 14.09,28.94 R6.1 14.09,29.14
SWDCLK  (1 unrouted)
  Top 0.152: U$1.P$AA24 31.04,7.81 TP_SWDCLK.TP | U$1.P$AA24
SWDIO  (2 unrouted)
SWO  (1 unrouted)
VBAT/1.2A
  Top 0.152: U1.2 U1.3 10.97,31.24 12.17,30.04 C37.2 12.98,31.03 TP11.TP
VBAT/2.5C  (1 unrouted)
VBUS/1.5D  (1 unrouted)
  Top 0.152: 27.17,25.02 28.38,26.23 C31.1 29.5,26.5 28.36,27.64 J3.A4_B9 | 27.17,25.02 25.96,23.81 | 25.96,23.81 D1.5 | J3.A9_B4 23.56,26.21 24.75,25.02 | 24.75,25.02 25.96,23.81 | 24.75,25.02 27.17,25.02
VBUS/2.6D  (1 unrouted)
VREG  (3 unrouted)
  Top 0.152: IC2.A2 7.56,27.81 C5.2 | TP_VREG.TP 5.39,27.97 IC2.A3 | IC2.A1 9.38,27.97 C4.2 11.19,28.04 11.65,28.5 11.72,28.5 IC1.B2
(copper drawn outside any net)
  shapes: Bottom area x2, Route2 area x1, Route63 area x1